# Altium PCB PCB1.PcbDoc
Units mil, origin at the board's own origin, x right, y up, seen from the top; angles counter-clockwise.
Board outline 3740.16 x 3345.16 mil, 2 copper layers (Top Layer, Bottom Layer); 67 components, 35 nets, 276 pads, 45 vias.
Unrouted connection lines stored in the file: 4.
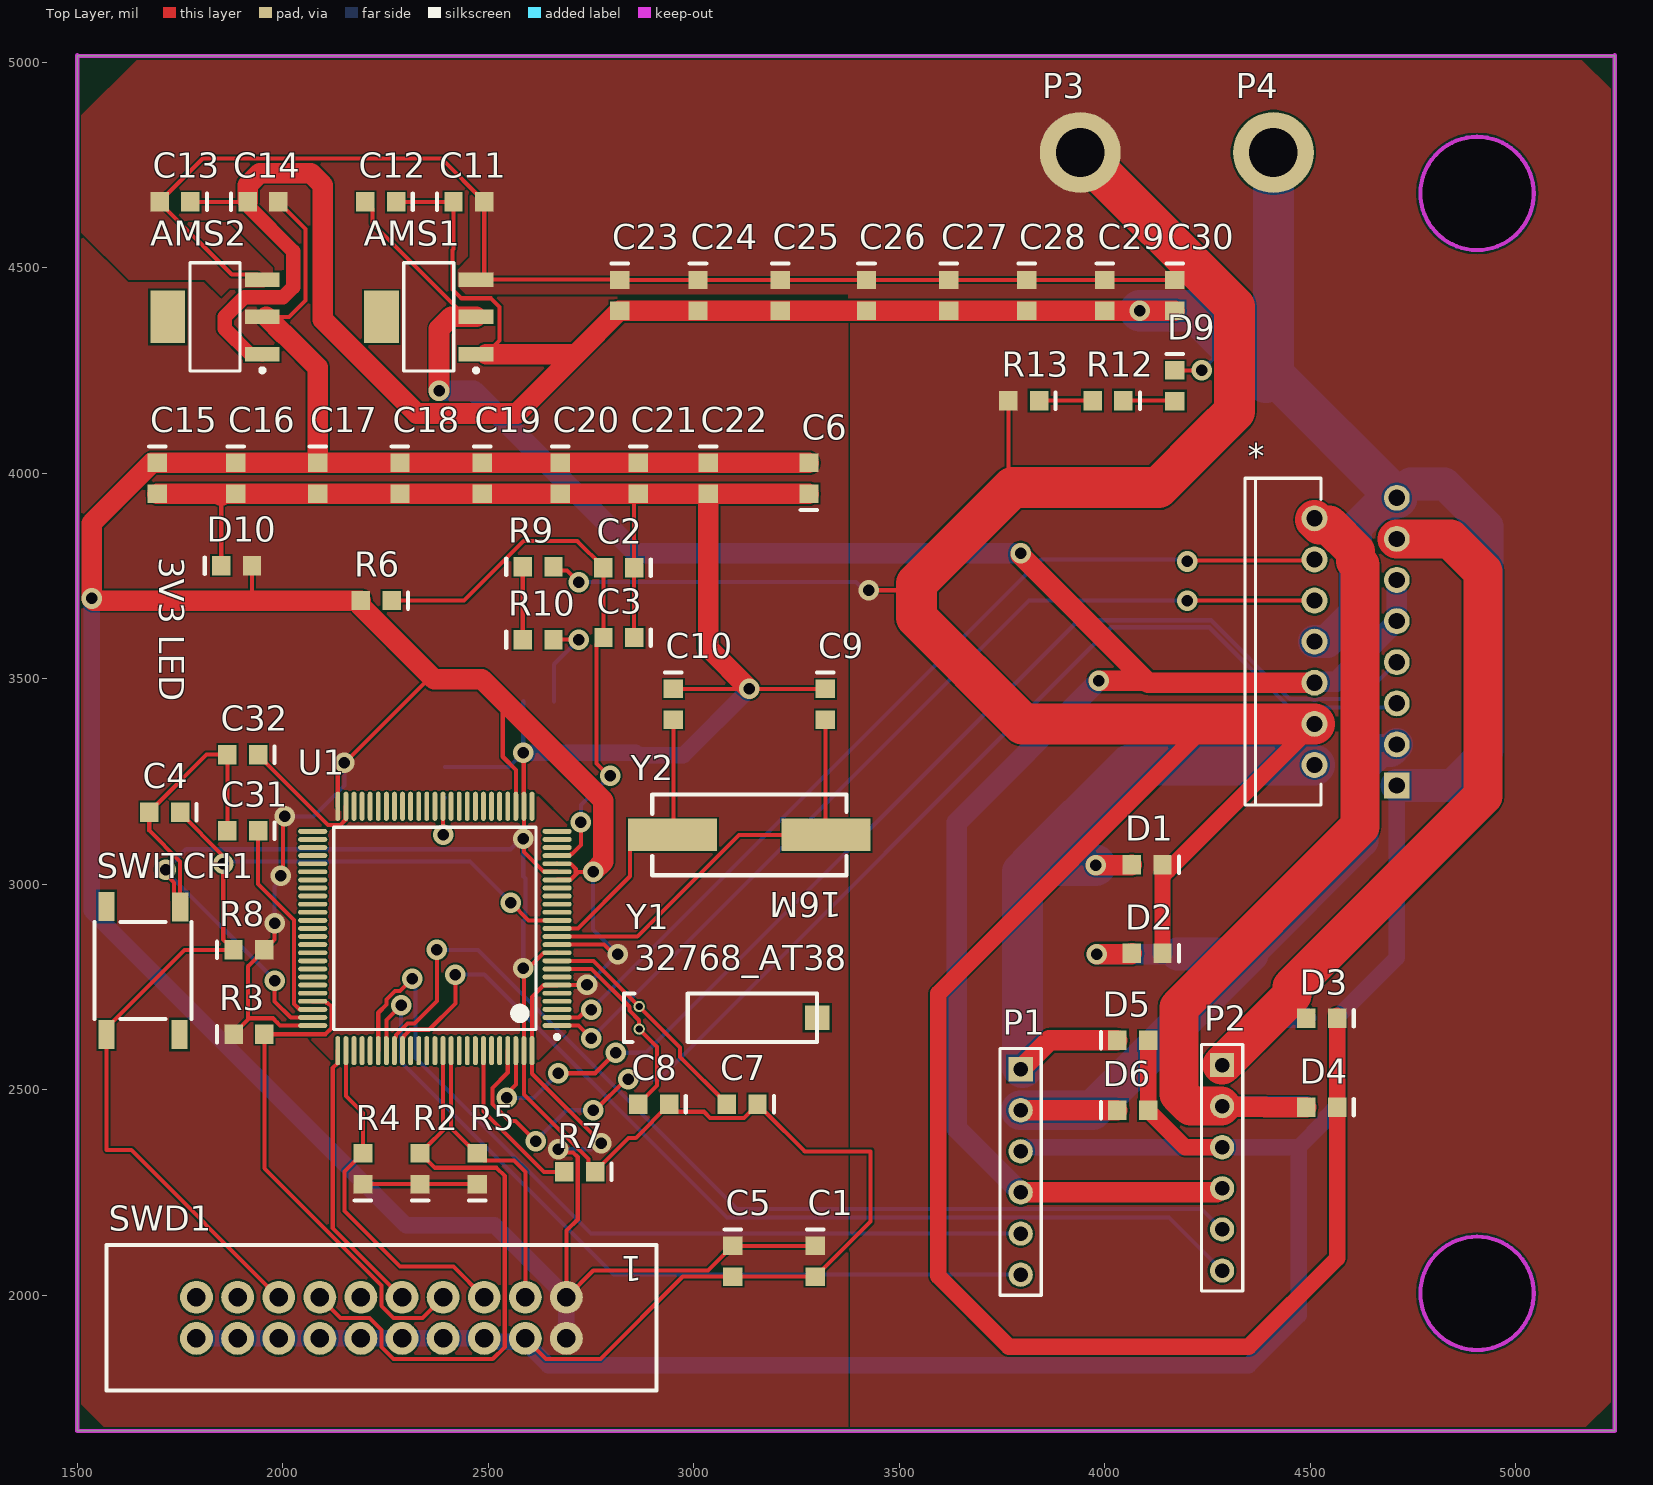
[diagram p0: Top Layer view]
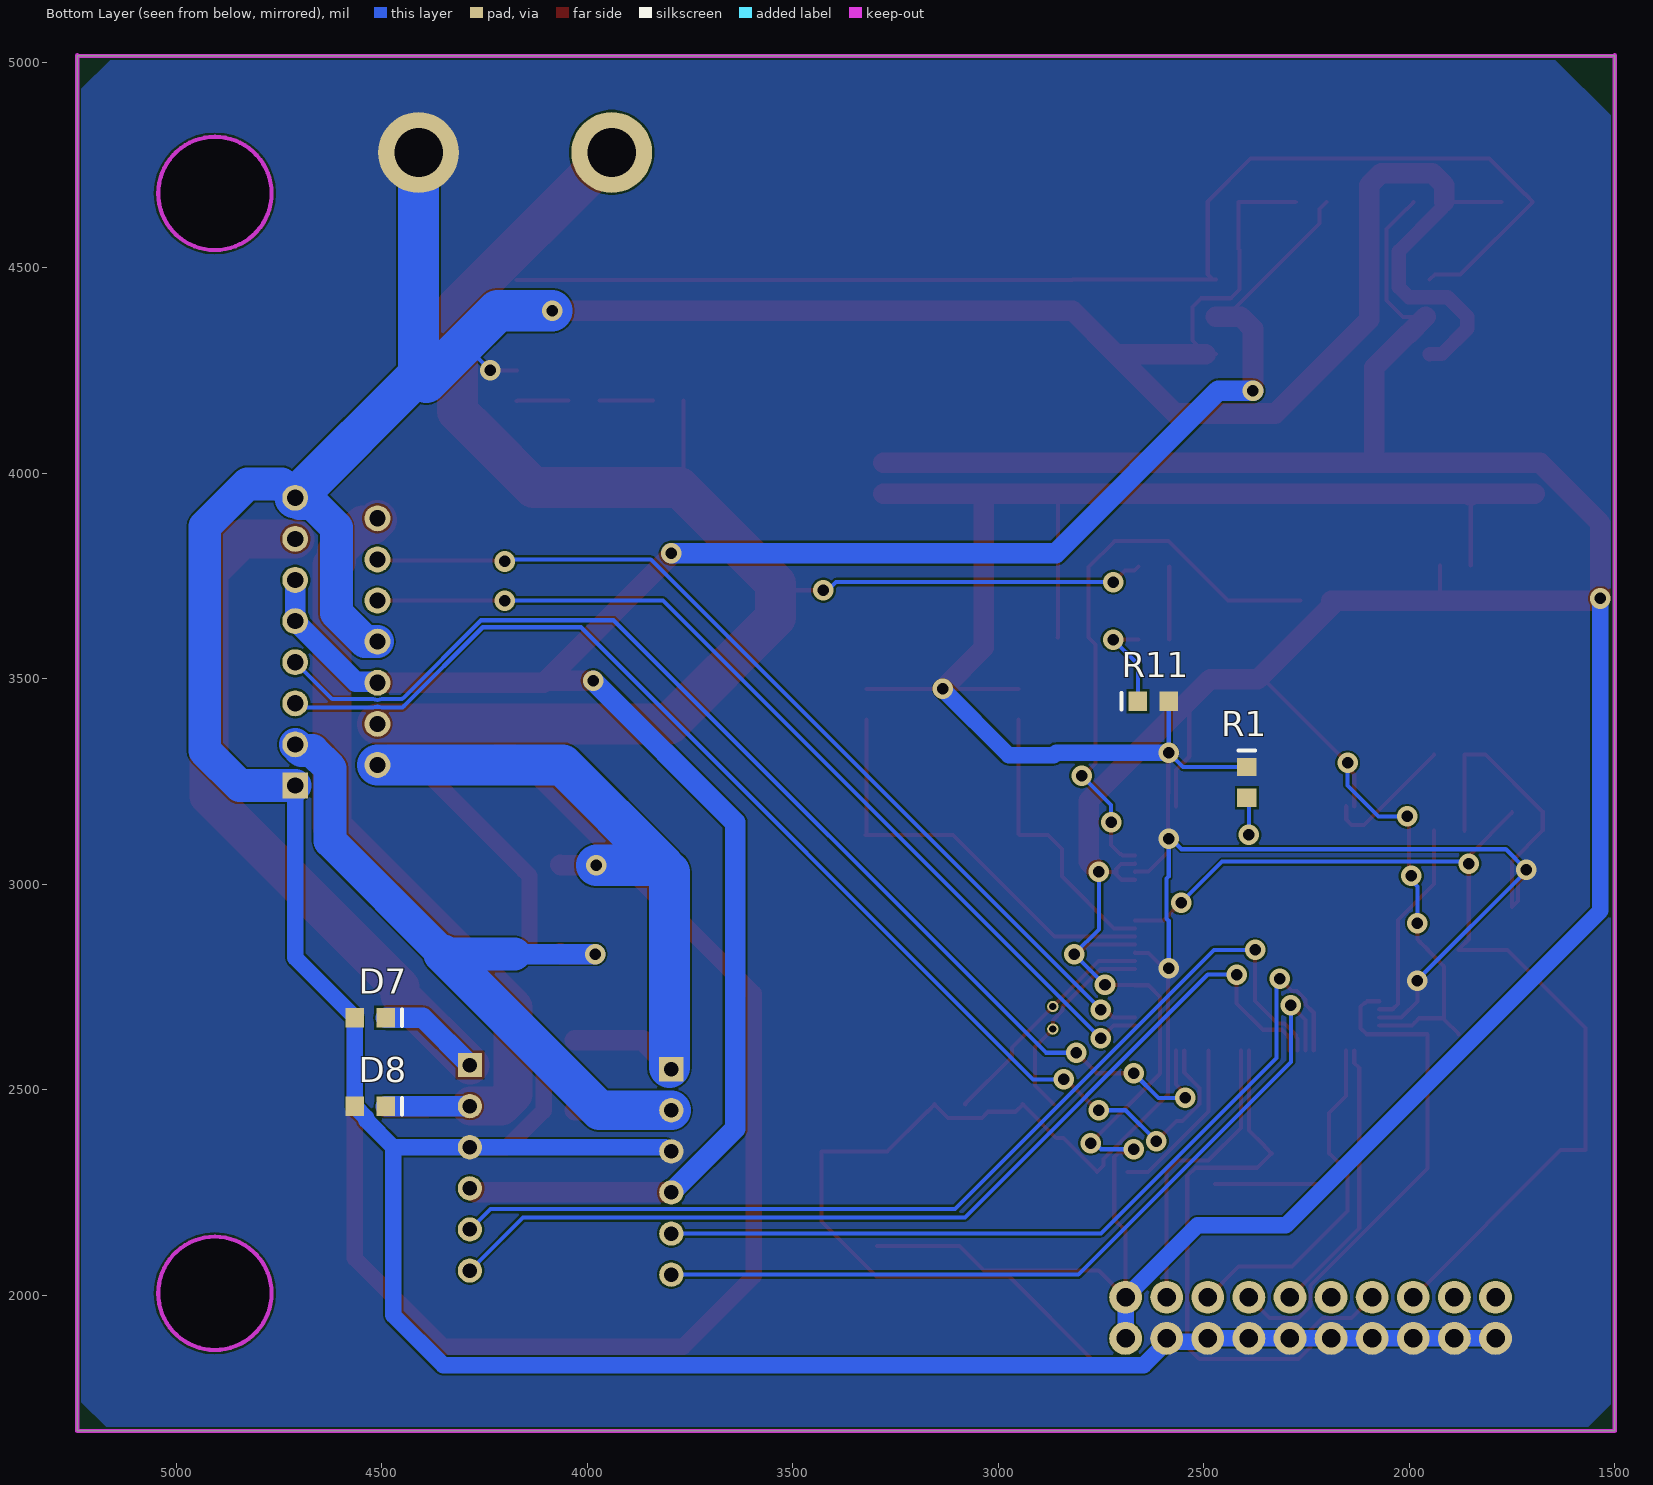
[diagram p1: Bottom Layer view, seen from below]

## Layer stack, top to bottom
Top Solder: solder mask 0.4, Solder Resist, Dk 3.5
Top Layer: signal copper 1.4
Dielectric 1: dielectric 12.6, FR-4, Dk 4.8
Bottom Layer: signal copper 1.4
Bottom Solder: solder mask 0.4, Solder Resist, Dk 3.5

## Board outline
1500,1670 1500,5015.16 5240.16,5015.16 5240.16,1670
cut-out: 4767.56,2004.65 ccw(c4905.35,2004.65) 4905.35,1866.85 ccw(c4905.35,2004.65) 5043.15,2004.65 ccw(c4905.35,2004.65) 4905.35,2142.44 ccw(c4905.35,2004.65)
cut-out: 4767.56,4680.35 ccw(c4905.35,4680.35) 4905.35,4542.56 ccw(c4905.35,4680.35) 5043.15,4680.35 ccw(c4905.35,4680.35) 4905.35,4818.15 ccw(c4905.35,4680.35)

## Design rules (kind name [scope] priority, off if disabled: settings)
Clearance [All] p1: gap=5 ignorepadtopadclearanceinfootprint=FALSE
PlaneConnect [All] p1: planeconnectstyle=Direct reliefexpansion=20 reliefentries=4 reliefconductorwidth=10 reliefairgap=10
PolygonConnect [All] p1: connectstyle=Direct reliefconductorwidth=10 reliefentries=4 polygonreliefangle="90 Angle" airgapwidth=10
RoutingVias [All] p1: holewidth=28 width=50 viastyle="Through Hole" minholewidth=28 minwidth=50 maxholewidth=28 maxwidth=50
SolderMaskExpansion [All] p1: expansion=4 istentingtop=FALSE
Width [All] p1: maxlimit=100 minlimit=10 preferedwidth=10
29 further rules are at their usual default settings.

## Classes and differential pairs
component class STM32F407VET6: C1 C2 C3 C4 C5 C6 C7 C8 C9 C10 C31 C32 R1 R2 R3 R4 R5 R6 R7 R8 SWD1 SWITCH1 U1 Y1 Y2
component class POWER: AMS1 AMS2 C11 C12 C13 C14 C15 C16 C17 C18 C19 C20 C21 C22 C23 C24 C25 C26 C27 C28 C29 C30 D9 D10 P3 P4 R9 R10 R11 R12 R13
component class MOTOR1: * D1 D2 D3 D4 D5 D6 D7 D8 P1 P2
net class M2EC[1..2]: M2EC1 M2EC2
net class M2CTL[1..2]: M2CTL1 M2CTL2
net class M1EC[1..2]: M1EC1 M1EC2
net class M1CTL[1..2]: M1CTL1 M1CTL2

## Components (designator, comment, footprint, x,y, rotation, side; value= is the part's Value field where it differs from the comment)
* "L298N" L298N-DIP -44488.23,-45849.15 r180 top
AMS1 "AMS1117" AMS1117 2355,4380 r180 top
AMS2 "AMS1117" AMS1117 1835,4380 r180 top
C1 "104" MY0805 3295,2045.2 r90 top
C2 "106" MY0805 2780,3770 r0 top
C3 "106" MY0805 2780.2,3600 r0 top
C4 "106" MY0805 1675.2,3175 r0 top
C5 "102" MY0805 3095,2045.2 r90 top
C6 "106" MY0805 3280,4025 r270 top
C7 "20pF" MY0805 3080,2465 r0 top value=20PF
C8 "20pF" MY0805 2865.2,2465 r0 top value=20PF
C9 "20pF" MY0805 3320,3400.2 r90 top value=20PF
C10 "20pF" MY0805 2950,3400.2 r90 top value=20PF
C11 "22uF" MY0805 2490.04,4660 r180 top
C12 "22uF" MY0805 2201.05,4660 r0 top
C13 "22uF" MY0805 1700.2,4660 r0 top
C14 "22uF" MY0805 1989.18,4660 r180 top
C15 "104" MY0805 1695,3950 r90 top
C16 "104" MY0805 1885,3950 r90 top
C17 "104" MY0805 2085,3950 r90 top
C18 "104" MY0805 2285,3950 r90 top
C19 "104" MY0805 2485,3950 r90 top
C20 "104" MY0805 2675,3950 r90 top
C21 "104" MY0805 2865,3950 r90 top
C22 "104" MY0805 3035,3950 r90 top
C23 "106" MY0805 2820,4395 r90 top
C24 "106" MY0805 3010,4395 r90 top
C25 "106" MY0805 3210,4395 r90 top
C26 "106" MY0805 3420,4395 r90 top
C27 "106" MY0805 3620,4395 r90 top
C28 "106" MY0805 3810,4395 r90 top
C29 "106" MY0805 4000,4395 r90 top
C30 "106" MY0805 4170,4395 r90 top
C31 "2.2uF" MY0805 1865,3130 r0 top
C32 "2.2uF" MY0805 1865,3315 r0 top
D1 "Diode" MY0805 4065.2,3047.22 r0 top
D2 "Diode" MY0805 4065.2,2831.67 r0 top
D3 "Diode" MY0805 4490.2,2673.33 r0 top
D4 "Diode" MY0805 4490.2,2457.78 r0 top
D5 "Diode" MY0805 4105,2620 r180 top
D6 "Diode" MY0805 4105,2450 r180 top
D7 "Diode" MY0805 4565,2675 r180 bottom
D8 "Diode" MY0805 4564.8,2460 r180 bottom
D9 "LED2" MY0805 4170,4175.2 r90 top
D10 "LED2" MY0805 1925,3775 r180 top
P1 "Header 6" HDR1X6 3795,2550 r270 top
P2 "Header 6" HDR1X6 4285,2560 r270 top
P3 "Plug_12V" Hole_3MM 3940,4780 r0 top
P4 "Plug_GND" Hole_3MM 4410,4780 r0 top
R1 "1K" MY0805 2395,3210.2 r90 bottom
R2 "1K" MY0805 2333.81,2345 r270 top
R3 "1K" MY0805 1955,2635 r180 top
R4 "1K" MY0805 2195,2345 r270 top
R5 "1K" MY0805 2472.63,2345 r270 top
R6 "0R" MY0805 2190,3690 r0 top
R7 "10K" MY0805 2685,2300 r0 top
R8 "10K" MY0805 1954.8,2840 r180 top
R9 "10K" MY0805 2658.56,3772.5 r180 top
R10 "1K" MY0805 2658.56,3595 r180 top
R11 "1K" MY0805 2585.2,3445 r0 bottom
R12 "220R" MY0805 3970.2,4176.38 r0 top value=1K
R13 "220R" MY0805 3765.2,4176.38 r0 top value=1K
SWD1 "SWD/JTAG" SWD 2240,1945 r180 top
SWITCH1 "开关" 开关 1660,2790 r270 top
U1 "STM32F407VET6" STM-LQFP100_N 2370,2892.24 r180 top
Y1 "晶振32768" 晶振32768K_AT38 2985.04,2675 r270 top
Y2 "晶振16M" 晶振16M 3135,3120 r180 top

## Footprints (in the part's own frame and the unit in brackets; to place one, negate y for a bottom-side part, rotate by r counter-clockwise, add the part's x,y. Pads: shape width x height; smd on the part's side, far side on the other; paste and mask are expansions set on the pad)
AMS1117 [mm] "SOT223, 4-Leads, Body 6.50x7.00mm (avg), Pitch 2.30mm, IPC Medium Density"
  rect 2.15x0.9 smd: 1(-2.925,2.3) 2(-2.925,0) 3(-2.925,-2.3)
  rect 2.15x3.25 smd: 4(2.925,0)
  silkscreen extent -3.05,-3.35 1.55,3.42, body extent -1.85,-3.35 1.85,3.35, height 1.8
HDR1X6 [mm] "Connector; Header; 6 Position"
  rect 1.5x1.5 hole 0.9: 1(0,0)
  round 1.5 hole 0.9: 2(2.54,0) 3(5.08,0) 4(7.62,0) 5(10.16,0) 6(12.7,0)
  silkscreen extent -1.27,-1.27 13.97,1.27
Hole_3MM [mm]
  round 5 hole 3: 1(0,0)
L298N-DIP [mm]
  rect 1.6x1.6 hole 1: 1(-1249.635,-1246.864)
  round 1.6 hole 1: 2(-1244.555,-1248.134) 3(-1249.635,-1249.404) 4(-1244.555,-1250.674) 5(-1249.635,-1251.944) 6(-1244.555,-1253.214) 7(-1249.635,-1254.484) 8(-1244.555,-1255.754) 9(-1249.635,-1257.024) 10(-1244.555,-1258.294) 11(-1249.635,-1259.564) 12(-1244.555,-1260.834) 13(-1249.635,-1262.104) 14(-1244.555,-1263.374) 15(-1249.635,-1264.644)
  silkscreen extent -1244.95,-1265.85 -1240.25,-1245.65
MY0805 [mm]
  rect 1.14x1.2 smd: 1(0,0) 2(1.9,0)
  silkscreen extent 2.92,-0.51 2.92,0.51
STM-LQFP100_N [mm] "Thin QFP, 100-Leads, Body 14x14mm, Pitch 0.5mm, IPC Medium Density"
  oval 1.8x0.3 smd: 1(-7.55,6) 2(-7.55,5.5) 3(-7.55,5) 4(-7.55,4.5) 5(-7.55,4) 6(-7.55,3.5) 7(-7.55,3) 8(-7.55,2.5) 9(-7.55,2) 10(-7.55,1.5) 11(-7.55,1) 12(-7.55,0.5) 13(-7.55,0) 14(-7.55,-0.5) 15(-7.55,-1) 16(-7.55,-1.5) 17(-7.55,-2) 18(-7.55,-2.5) 19(-7.55,-3) 20(-7.55,-3.5) 21(-7.55,-4) 22(-7.55,-4.5) 23(-7.55,-5) 24(-7.55,-5.5) 25(-7.55,-6) 51(7.55,-6) 52(7.55,-5.5) 53(7.55,-5) 54(7.55,-4.5) 55(7.55,-4) 56(7.55,-3.5) 57(7.55,-3) 58(7.55,-2.5) 59(7.55,-2) 60(7.55,-1.5) 61(7.55,-1) 62(7.55,-0.5) 63(7.55,0) 64(7.55,0.5) 65(7.55,1) 66(7.55,1.5) 67(7.55,2) 68(7.55,2.5) 69(7.55,3) 70(7.55,3.5) 71(7.55,4) 72(7.55,4.5) 73(7.55,5) 74(7.55,5.5) 75(7.55,6)
  oval 0.3x1.8 smd: 26(-6,-7.55) 27(-5.5,-7.55) 28(-5,-7.55) 29(-4.5,-7.55) 30(-4,-7.55) 31(-3.5,-7.55) 32(-3,-7.55) 33(-2.5,-7.55) 34(-2,-7.55) 35(-1.5,-7.55) 36(-1,-7.55) 37(-0.5,-7.55) 38(0,-7.55) 39(0.5,-7.55) 40(1,-7.55) 41(1.5,-7.55) 42(2,-7.55) 43(2.5,-7.55) 44(3,-7.55) 45(3.5,-7.55) 46(4,-7.55) 47(4.5,-7.55) 48(5,-7.55) 49(5.5,-7.55) 50(6,-7.55) 76(6,7.55) 77(5.5,7.55) 78(5,7.55) 79(4.5,7.55) 80(4,7.55) 81(3.5,7.55) 82(3,7.55) 83(2.5,7.55) 84(2,7.55) 85(1.5,7.55) 86(1,7.55) 87(0.5,7.55) 88(0,7.55) 89(-0.5,7.55) 90(-1,7.55) 91(-1.5,7.55) 92(-2,7.55) 93(-2.5,7.55) 94(-3,7.55) 95(-3.5,7.55) 96(-4,7.55) 97(-4.5,7.55) 98(-5,7.55) 99(-5.5,7.55) 100(-6,7.55)
  silkscreen extent -7.68,-6.25 6.25,6.82, body extent -7,-7 7,7, height 1.6
SWD [mil]
  round 80 hole 45: 1(-450,-50) 2(-450,50) 3(-350,-50) 4(-350,50) 5(-250,-50) 6(-250,50) 7(-150,-50) 8(-150,50) 9(-50,-50) 10(-50,50) 11(50,-50) 12(50,50) 13(150,-50) 14(150,50) 15(250,-50) 16(250,50) 17(350,-50) 18(350,50) 19(450,-50) 20(450,50)
  silkscreen extent -669,-177 669,177
开关 [mm]
  rect 1.8x1 smd: 1(-3.916,2.293) 2(3.95,2.25) 3(-3.95,-2.25) 4(3.95,-2.25)
  silkscreen extent -3,-3 3,3
晶振16M [mm]
  rect 5.5x2 smd: 1(-4.75,0) 2(4.75,0)
  silkscreen extent -6,-2.5 6,2.5
晶振32768K_AT38 [mm]
  round 0.7 hole 0.45: 1(-0.7,-3) 2(0.7,-3)
  rect 1.524x1.524 smd: 4(0,8)
  silkscreen extent -1.5,-3.94 1.5,8

## Part data
C1 C2 C3 C4 C5 C6 C7 C8 C9 C10 C15 C16 C17 C18 C19 C20 C21 C22 C23 C24 C25 C26 C27 C28 C29 C30 C31 C32: library part Cap, "Capacitor", LatestRevisionDate=17-Jul-2002, LatestRevisionNote="Re-released for DXP Platform.", PackageDescription="Radial Cap, Thru-Hole; 2 Leads; 0.3 in Pin Spacing", PackageReference=RAD-0.3, Published=8-Jun-2000, Publisher="Altium Limited"
C11 C12 C13 C14: library part "Cap Pol2", "Polarized Capacitor (Axial)", LatestRevisionDate=17-Jul-2002, LatestRevisionNote="Re-released for DXP Platform.", PackageDescription="Polarized Capacitor; 2 Leads", PackageReference=POLAR0.8, Published=8-Jun-2000, Publisher="Altium Limited"
D1 D2 D3 D4 D5 D6 D7 D8: "Default Diode", Code_JEDEC=DO-214-AB, LatestRevisionDate=17-Jul-2002, LatestRevisionNote="Re-released for DXP Platform.", PackageDescription="DO-214-AB/SMC; 2 C-Bend Leads; Body 7.9 x 5.9 mm, inc. leads (LxW)", PackageReference=SMC, PackageVersion=Sep-1996, Published=8-Jun-2000, Publisher="Altium Limited"
D9 D10: "Typical RED, GREEN, YELLOW, AMBER GaAs LED", LatestRevisionDate=17-Jul-2002, LatestRevisionNote="Re-released for DXP Platform.", PackageDescription="SM LED; 2 Flat Leads", PackageReference=3.2X1.6X1.1, PackageVersion=Feb-2002, Published=8-Jun-2000, Publisher="Altium Limited"
P1 P2: "Header, 6-Pin", LatestRevisionDate=17-Jul-2002, LatestRevisionNote="Re-released for DXP Platform.", Publisher="Altium Limited"
P3: library part Plug, LatestRevisionDate=17-Jul-2002, LatestRevisionNote="Re-released for DXP Platform.", Publisher="Altium Limited"
P4: library part Plug, "Plug", LatestRevisionDate=17-Jul-2002, LatestRevisionNote="Re-released for DXP Platform.", Publisher="Altium Limited"
R1 R2 R3 R4 R5 R6 R7 R8 R9 R10 R11 R12 R13: library part Res3, "Resistor", LatestRevisionDate=29-May-2009, LatestRevisionNote="IPC-7351 Footprint Added.", PackageDescription="Chip Resistor", PackageReference=J1-0603, Published=8-Jun-2000, Publisher="Altium Limited"
U1: "ARM Cortex-M4 32-bit MCU+FPU, 210 DMIPS, 512 kB Flash, 192 kB Internal RAM, 82 I/Os, 100-pin LQFP, -40 to 85 degC, Tray", I/Os (High Current)=82, Manufacturer=STMicroelectronics, Operating Frequency(F) (Processor speed) (MHz)=168, Supplier Part Number 1=497-12075-ND, Supply Voltage(Vcc) max (V)=3.6, Supply Voltage(Vcc) min (V)=1.8, ComponentLink1Description="Manufacturer URL", ComponentLink1URL=http://www.st.com/web/en/home.html, ComponentLink2Description=Datasheet, ComponentLink2URL=http://www.st.com/st-web-ui/static/active/en/resource/technical/document/datasheet/DM00037051.pdf, ComponentLink3Description="Package Specification", ComponentLink3URL=http://www.st.com/st-web-ui/static/active/en/resource/technical/document/data_brief/DM00071938.pdf, Core="ARM Cortex-M4", D/A Converter=2x12-bit, DatasheetVersion="Rev. 4", FLASH Size (Prog) (kB)=512, Internal RAM Size (kB)=192, Mounting Technology="Surface Mount", PackageDescription="100-Pin Low Profile Quad Flat Package, 14 x 14 mm Body, 0.5 mm Pitch", PackageReference=LQFP100, PackageVersion="Rev. 1, 06/2013", Packing=Tray, PartNumber=STM32F407VET6, Supplier 1=Digi-Key, Supplier 2=Farnell, Supplier 3=Newark, Supplier 4=Mouser, Supplier Part Number 2=2064367, Supplier Part Number 3=73T2332, Supplier Part Number 4=511-STM32F407VET6
Y1 Y2: library part 晶振

## Via types
v1: diameter 50, hole 28, Top Layer to Bottom Layer, 45 vias

## Nets (pads, with @x,y where several pads share a name; then routed paths per layer and width w, separated by ;. In a path a pad name is that pad's centre, name@x,y a point inside that pad or via, vN(x,y) a via of type N, cw(c..) or ccw(c..) an arc to the next point about the centre after c; other vN are vias at no path point)
+5: *.6 *.9 *.11 AMS1.2 C12.1 P1.4 P2.4 | length 5502.3
  Top Layer w10: C12.1 2218.49,4642.56 2218.49,4607.06 AMS1.2@2445.55,4380 ; P1.4 P1.4@3800,2255 ; P2.4@4280,2255 P2.4
  Top Layer w50: v1(2380,4200) 2380,4350.71 2409.29,4380 2445.55,4380 AMS1.2 ; P1.4 4272.55,2250 4282.55,2260 P2.4 ; v1(3795,3805) 3795,3800 4100,3495 ; v1(3985,3495) 4100,3495 ; *.6 4105,3490 4100,3495 ; *.11@4706.48,3740 *.11
  Bottom Layer w50: v1(2380,4200) 2465,4200 2860,3805 v1(3795,3805) ; P1.4 3640,2405 3640,3150 v1(3985,3495) ; *.6 4512.49,3492.49 4562.49,3492.49 *.9 *.11
+12: *.4 AMS1.3 AMS2.3 C11.1 C13.1 C23.2 C24.2 C25.2 C26.2 C27.2 C28.2 C29.2 C30.2 D1.2 D2.2 D3.2 D4.2 P3.1 R9.1 R13.1 | length 11173.7
  Top Layer w10: AMS2.3 1937.44,4483.27 1875.75,4483.27 1700.2,4658.82 1700.2,4661.18 1717.64,4678.62 1718.82,4678.62 1805.2,4765 2386.22,4765 2490.04,4661.18 C11.1 2490.04,4483.27 AMS1.3@2477.32,4470.55 ; AMS1.3 AMS1.3@2477.32,4470.55 ; R9.1 2667.77,3763.28 2691.72,3763.28 v1(2720,3735) ; v1(3425,3715) 3525,3715 3541.42,3731.42 ; R13.1 3765.2,3974.8 3775,3965 ; C30.2@4171.18,4469.8 C30.2 C29.2 C28.2 C27.2 C26.2 C25.2 C24.2 C23.2 2819.25,4470.55 AMS1.3@2477.32,4470.55 ; 4253.88,4092.5 4257.5,4092.5
  Top Layer w40: D2.2 4140,3020 4153.61,3033.61 *.4 ; 4250.75,3390 3595,2734.25 3595,2046.08 3766.08,1875 4350,1875 4565,2090 D4.2 D3.2 D3.2@4565,2679.95
  Top Layer w100: P3.1 4315,4405 4315,4150 4257.5,4092.5 4130,3965 3775,3965 3541.42,3731.42 3541.42,3648.58 3800,3390 4250.75,3390 *.4
  Bottom Layer w10: v1(2720,3735) 3394.18,3735 3414.18,3715 v1(3425,3715)
GND: *.1 *.8 *.15 AMS1.1 AMS2.1 C1.1 C2.2 C3.2 C4.1 C5.1 C6.2 C7.2 C8.2 C9.2 C10.2 C11.2 C12.2 C13.2 C14.2 C15.1 C16.1 C17.1 C18.1 C19.1 C20.1 C21.1 C22.1 C23.1 C24.1 C25.1 C26.1 C27.1 C28.1 C29.1 C30.1 C31.1 C32.1 D5.1 D6.1 D7.1 D8.1 D9.2 D10.2 P1.3 P2.3 P4.1 R1.2 R7.2 R11.1 SWD1.4 SWD1.6 SWD1.8 SWD1.10 SWD1.12 SWD1.14 SWD1.16 SWD1.18 SWD1.20 SWITCH1.1 U1.10 U1.20 U1.27 U1.74 U1.99 | length 22164.2
  Top Layer w10: v1(1715,3035) 1715,3024.18 1735.6,3003.57 1735.6,2958.87 SWITCH1.1 1750.29,3055.09 1675.2,3130.18 C4.1 1675.2,3176.18 1814.02,3315 C32.1 C31.1 ; C13.2 C14.2 ; D10.2 1850.2,3945.2 ; v1(1980,2765) 1980,2715 2019.29,2675.71 U1.74 ; C12.2 C11.2 2415.24,4545.2 2412.83,4542.8 2412.83,4446.62 2434.18,4425.28 2506.13,4425.28 2527.48,4403.93 2527.48,4322.17 2494.76,4289.45 AMS1.1 ; v1(2585,3320) 2586.19,3318.81 2586.19,3219.85 2586.54,3219.51 U1.27 2586.54,3078.41 2634.56,3030.39 2666.9,3030.39 U1.20 ; SWD1.4 2640,1845 2772.74,1845 2972.93,2045.2 C5.1 C1.1 3296.18,2045.2 3430,2179.02 3430,2350 3269.8,2350 3173.43,2446.38 3172.24,2446.38 C7.2@3154.8,2463.82 ; U1.10 2666.9,2832.84 2634.56,2832.84 2586.54,2784.82 U1.99 2586.54,2488.46 2743.76,2331.24 2743.76,2316.04 R7.2 ; R7.2@2759.8,2301.18 2841.12,2382.5 2858.68,2382.5 C8.2@2940,2463.82 ; C23.1@2818.82,4395 C23.1 ; C3.2 2854.8,3600.2 C2.2 2854.8,3939.8 C21.1 ; C8.2 C8.2@2940,2463.82 ; C10.2 v1(3135,3475) C9.2 ; C7.2 C7.2@3154.8,2463.82 ; C6.2@3279.8,3950 C6.2 ; D9.2 v1(4235,4250) ; C8.2@2940,2463.82 2957.44,2446.38 3024.51,2446.38 3039.51,2431.38 3122.36,2431.38 C7.2@3154.8,2463.82
  Top Layer w35: C14.2 1919.32,4655.06 1919.32,4645.68 2025,4540 2025,4452 2000.5,4427.5 1905.8,4427.5 1858.65,4380.35 1858.65,4351.35 1920.33,4289.67 1949.94,4289.67 AMS2.1
  Top Layer w40: D5.1 D6.1 4105,2448.82 4107.44,2446.38 4108.62,2446.38 4195,2360 P2.3
  Top Layer w50: C15.1 1855,3950 ; 1850.2,3945.2 1855,3950 ; C14.2 1914.38,4700.71 1943.67,4730 2068.21,4730 2097.5,4700.71 2097.5,4373.62 2326.12,4145 2568.82,4145 2713.27,4289.45 ; AMS1.1@2494.76,4289.45 2713.27,4289.45 ; C23.1@2818.82,4395 2713.27,4289.45 ; C23.1 C24.1 C25.1 C26.1 C27.1 C28.1 C29.1 v1(4085,4395) C30.1 ; v1(3135,3475) 3035,3575 C22.1 ; C6.2@3279.8,3950 C22.1 ; 1855,3950 C16.1 C17.1 C18.1 C19.1 C20.1 C21.1 C22.1
  Bottom Layer w10: v1(1980,2765) 1980,2767.5 1715,3032.5 v1(1715,3035) 1765,3085 2553.43,3085 2578.43,3110 v1(2585,3110) 2585,3018.51 2590,3013.51 2590,2915.99 2585,2910.99 v1(2585,2795) ; R1.2 2550,3285 v1(2585,3320) 2585,3444.8 R11.1 ; P1.3 P1.3@3800.16,2350 ; v1(4235,4250) 4291.13,4306.13 4306.13,4306.13 ; D8.1 D8.1@4565,2460.2
  Bottom Layer w40: SWD1.20 SWD1.18 SWD1.16 SWD1.14 SWD1.12 SWD1.10 SWD1.8 SWD1.6 2497.65,1887.35 2588.48,1887.35 2645.82,1830 4350,1830 4471.42,1951.42 4471.42,2360 ; v1(2585,3320) 2858.33,3320 2864.43,3313.9 2973.9,3313.9 v1(3135,3475) ; P1.3@3800.16,2350 3810.16,2360 P2.3 4471.42,2360 ; D8.1 4564.8,2458.82 4537.44,2431.46 4537.44,2426.02 4471.42,2360 ; D8.1@4565,2460.2 4564.9,2460.3 4564.9,2674.9 D7.1 4565,2676.18 4710,2821.18 *.1
  Bottom Layer w50: *.15@4710,3936.48 *.15
  Bottom Layer w80: *.8 4540,3590 4610,3660 4610,3867.92 4668.58,3926.5 4700.01,3926.5 *.15@4710,3936.48 ; *.1 4845,3240 4930,3325 4930,3870 4826.42,3973.58 4743.58,3973.58
  Bottom Layer w100: v1(4085,4395) 4217.27,4395 4306.13,4306.13 4391.13,4221.13 ; P4.1@4410,4795.03 4410,4240 *.15
M1CTL1: *.5 U1.97 | length 2985.3
  Top Layer w10: U1.97 2547.17,2541.66 2510,2504.5 2510,2465.5 2551.42,2424.08 2565.92,2424.08 v1(2615,2375) ; v1(2755,2450) 2760,2450 2835,2525 v1(2840,2525)
  Bottom Layer w10: v1(2615,2375) 2690,2450 v1(2755,2450) ; v1(2840,2525) 2915,2525 4015,3625 4253.79,3625 4445.86,3432.93 4448.79,3430 4498.96,3430 cw(c4510,3390) 4521.04,3430 4700,3430 *.5
M1CTL2: *.7 U1.98 | length 2887.5
  Top Layer w10: v1(2545,2480) 2545,2490.82 2566.85,2512.67 U1.98 ; v1(2670,2540) 2760,2540 v1(2810,2590)
  Bottom Layer w10: v1(2545,2480) 2610,2480 v1(2670,2540) ; v1(2810,2590) 2883.79,2590 3935.86,3642.07 4257.93,3642.07 4447.07,3452.93 4450,3450 4498.96,3450 ccw(c4510,3490) 4521.04,3450 4620,3450 *.7
M1EC1: P1.5 U1.81 | length 2061.4
  Top Layer w10: U1.81 2232.2,2687.2 2252.65,2707.65 2252.65,2719.5 2273.16,2740 2285,2740 v1(2315,2770)
  Bottom Layer w10: v1(2315,2770) 2322.65,2762.35 2322.65,2577.35 2750,2150 P1.5
M1EC2: P1.6 U1.82 | length 1984.1
  Top Layer w10: U1.82 2251.89,2669.24 v1(2287.65,2705)
  Bottom Layer w10: v1(2287.65,2705) 2287.65,2567.35 2805,2050 P1.6
M2CTL1: *.10 U1.1 | length 2296.7
  Top Layer w10: U1.1 2718.98,2656.02 v1(2750,2625) ; v1(4200,3690) *.10
  Bottom Layer w10: v1(2750,2625) 3815,3690 v1(4200,3690)
M2CTL2: *.12 U1.2 | length 2308.5
  Top Layer w10: U1.2 2719.88,2675.71 2739.18,2695 v1(2750,2695) ; v1(4200,3785) 4202.5,3787.5 4507.5,3787.5 *.12
  Bottom Layer w10: v1(2750,2695) 3845,3790 4195,3790 v1(4200,3785)
M2EC1: P2.5 U1.83 | length 2489.3
  Top Layer w10: U1.83 2271.57,2625.02 2275.35,2628.8 2275.35,2632.64 2303.52,2660.81 2320.31,2660.81 2375,2715.5 v1(2375,2840)
  Bottom Layer w10: v1(2375,2840) 2475,2840 3105,2210 4235,2210 P2.5
M2EC2: P2.6 U1.84 | length 2428.6
  Top Layer w10: U1.84 2291.26,2625.02 2295.04,2628.8 2295.04,2631.12 2309.73,2645.81 2355.81,2645.81 2420,2710 v1(2420,2780)
  Bottom Layer w10: v1(2420,2780) 2490,2780 3080.47,2189.53 4155.47,2189.53 P2.6
MOTOR_A_OUTPUT1: *.2 D1.1 D5.2 P1.1 | length 1814.9
  Top Layer w10: D1.1@4065.2,3046.04 D1.1
  Top Layer w50: P1.1 3865,2620 D5.2 ; v1(3977.42,3045.96) 4063.94,3045.96 D1.1
  Bottom Layer w50: P1.1 P1.1@3799.53,2554.53 ; 3799.53,3029.53 3815.96,3045.96
  Bottom Layer w100: P1.1@3799.53,2554.53 3799.53,3029.53 ; v1(3977.42,3045.96) 3815.96,3045.96 4060,3290 *.2
MOTOR_A_OUTPUT2: *.3 D2.1 D6.2 P1.2 | length 2078.2
  Top Layer w50: P1.2 D6.2 ; v1(3980,2830) 4063.53,2830 D2.1
  Bottom Layer w50: v1(3980,2830) 4176.48,2830
  Bottom Layer w80: 4176.48,2830 4350,2830 4625,3105 4625,3281.63 4668.37,3325 4695,3325 *.3
  Bottom Layer w95: P1.2 3970,2450 4350,2830
MOTOR_B_OUTPUT1: *.13 D3.1 D7.2 P2.1 | length 1959
  Top Layer w95: P2.1 4455,2730 4455,2750 4920,3215 4920,3760 4840,3840 *.13
  Bottom Layer w50: P2.1 4400,2675 D7.2
MOTOR_B_OUTPUT2: *.14 D4.1 D8.2 P2.2 | length 2170.5
  Top Layer w10: D4.1@4487.97,2460 D4.1
  Top Layer w50: P2.2 4286.73,2458.27 4389.44,2458.27 4389.93,2457.78 D4.1 ; *.14@4510,3886.48 *.14
  Top Layer w95: P2.2@4282.55,2460 4209.29,2460 4180,2489.29 4180,2700 4620,3140 4620,3776.48 4610,3786.48 4610,3808.79 4544.79,3874 4522.49,3874 *.14@4510,3886.48
  Bottom Layer w50: P2.2 D8.2
NetC2_1: C2.1 C3.1 R6.2 U1.22 | length 1399.6
  Top Layer w10: R6.2 2441.05,3690 2586.05,3835 2716.18,3835 2780,3771.18 C2.1 2780,3600.2 2762.76,3582.95 2762.76,3293.64 2792.49,3263.9 v1(2796.66,3263.9) ; U1.22 2697.26,3069.41 2701.04,3073.19 2703.36,3073.19 2725,3094.83 v1(2725,3150.65)
  Bottom Layer w10: v1(2725,3150.65) 2725,3192.24 v1(2796.66,3263.9)
NetC7_1: C7.1 U1.9 Y1.1 | length 572.6
  Top Layer w10: U1.9 2755.98,2813.5 2966.42,2603.06 2966.42,2579.76 3080,2466.18 C7.1 C7.1@3080,2463.82
NetC8_1: C8.1 U1.8 Y1.2 | length 497.1
  Top Layer w10: U1.8 2751.18,2793.82 2843.15,2701.85 2843.15,2692.71 2866.93,2668.93 Y1.2 2910,2604.37 2910,2509.8 C8.1
NetC9_1: C9.1 U1.12 Y2.1 | length 1038.3
  Top Layer w10: U1.12 2862.33,2872.56 3109.77,3120 Y2.1 3320,3122.01 C9.1
NetC10_1: C10.1 U1.13 Y2.2 | length 695
  Top Layer w10: U1.13 2717.68,2892.24 2844.72,3019.29 2844.72,3085.63 2879.09,3120 Y2.2 2950,3122.01 C10.1
NetC31_2: C31.2 U1.73 | length 508.6
  Top Layer w10: C31.2 1939.8,3000.2 2027.32,2912.68 2027.32,2708.49 2040.07,2695.74 2072.41,2695.74 U1.73
NetC32_2: C32.2 U1.49 | length 322.9
  Top Layer w10: C32.2 1939.8,3313.82 2109.57,3144.06 2140.37,3144.06 2153.12,3156.81 2153.12,3189.14 U1.49
NetD9_1: D9.1 R12.2 | length 126.7
  Top Layer w10: R12.2 4168.82,4176.38 D9.1 D9.1@4171.18,4175.2
NetR1_1: R1.1 U1.37 | length 161.9
  Top Layer w10: U1.37 2389.84,3189.33 2389.84,3120.16 v1(2390,3120)
  Bottom Layer w10: v1(2390,3120) 2390,3205.2 R1.1
NetR7_1: R7.1 U1.94 | length 405.8
  Top Layer w10: U1.94 2488.11,2446.89 2635,2300 R7.1
NetR10_1: R10.1 R11.2 | length 236.3
  Top Layer w10: R10.1 v1(2720,3595)
  Bottom Layer w10: R11.2 2660,3535 v1(2720,3595)
NetR12_1: R12.1 R13.2 | length 130.2
  Top Layer w10: R13.2 R12.1
REF_12V/6: R9.2 R10.2 | length 177.5
  Top Layer w10: R10.2 R9.2
RST: C4.2 R8.2 SWD1.15 SWITCH1.4 U1.14 | length 2514.1
  Top Layer w10: C4.2 1750,3173.82 1855,3068.82 1855,2865 1861.38,2858.62 1862.56,2858.62 1880,2841.18 R8.2 1761.18,2840 1571.42,2650.24 SWITCH1.4 1571.42,2353.58 1631.42,2353.58 SWD1.15 ; v1(2555,2955) 2598.07,2911.93 U1.14
  Bottom Layer w10: v1(1855,3050) 1860,3055 2455,3055 v1(2555,2955)
SWCLK: SWD1.9 U1.76 | length 675
  Top Layer w10: U1.76 2133.78,2564.98 2121.38,2552.58 2121.38,2163.62 SWD1.9
SWDIO: R3.1 SWD1.7 U1.72 | length 1234.7
  Top Layer w10: U1.72@2072.41,2714.73 U1.72 2102.77,2715.08 2106.55,2711.3 2108.87,2711.3 2118.19,2701.98 2118.19,2649.44 2103.75,2635 R3.1 1955,2308.79 2240,2023.79 2240,1974.29 2269.29,1945 2340,1945 SWD1.7
SWO: R2.1 SWD1.13 U1.89 | length 1465.9
  Top Layer w10: SWD1.13 2140,1945 2210.71,1945 2240,1915.71 2240,1874.29 2269.29,1845 2510.71,1845 2540,1874.29 2540,2290 2520,2310 2369.99,2310 R2.1@2334.99,2345 ; R2.1 R2.1@2334.99,2345 ; U1.89 2389.68,2400.87 2352.44,2363.62 2352.44,2362.44 R2.1@2334.99,2345
TDI: R4.1 SWD1.5 U1.77 | length 853.5
  Top Layer w10: U1.77 2153.46,2484.48 2195,2442.94 R4.1 2193.82,2345 2150,2301.18 2150,2205 2285,2070 2415,2070 SWD1.5
TRST: R5.1 SWD1.3 U1.90 | length 717.9
  Top Layer w10: U1.90 2409.37,2407.08 2488.89,2327.56 2562.44,2327.56 2590,2300 SWD1.3
VCC: AMS2.2 C1.2 C5.2 C6.1 C14.1 C15.2 C16.2 C17.2 C18.2 C19.2 C20.2 C21.2 C22.2 D10.1 R2.2 R3.2 R4.2 R5.2 R6.1 R8.1 SWD1.1 SWD1.2 U1.6 U1.11 U1.19 U1.21 U1.28 U1.50 U1.75 U1.100 | length 11252.3
  Top Layer w10: R3.2 1880.2,2636.18 1915,2670.98 ; 1925,3690 D10.1 ; AMS2.2 1960.2,4380 2015,4380 2055,4420 2055,4594.18 2007.81,4641.38 2006.62,4641.38 1989.18,4658.82 C14.1 ; v1(1980,2905) 1980,2865.2 1973.43,2858.62 1972.24,2858.62 1954.8,2841.18 R8.1 1915,2800.2 1915,2670.98 ; v1(1995,3020) 2000,3025 2000,3160 v1(2005,3165) ; U1.75 1993.3,2656.02 1987.44,2661.88 1987.44,2662.76 1976.36,2673.85 1917.87,2673.85 1915,2670.98 ; C17.2 C17.2@2085,4025 ; U1.50 2133.78,3267.96 2150,3284.18 v1(2150,3295) 2353.37,3498.37 2367.95,3498.37 ; R6.1@2190,3676.31 R6.1 ; R4.2 R2.2 R5.2 ; 2535,3445 2535,3310 2566.85,3278.15 U1.28 ; U1.11 2781.31,2852.87 2804.18,2830 v1(2815,2830) ; U1.19 2667.59,3010.7 2699.93,3010.7 2712.68,3023.45 ; U1.21 2667.59,3049.38 2700.62,3049.38 2712.68,3037.32 2712.68,3023.45 ; v1(2670.25,2355.25) 2677.9,2347.6 2706.19,2347.6 2717.44,2336.35 2717.44,2184.57 2690,2157.13 SWD1.1 2755.2,2060.2 3034.02,2060.2 3093.82,2120 C5.2 C1.2 ; v1(2740,2755) 2739.72,2754.72 2667.52,2754.72 U1.6 2666.9,2754.1 2634.56,2754.1 2606.22,2725.76 U1.100 2606.22,2538.78 v1(2775,2370) ; v1(2755,3030) 2719.23,3030 2712.68,3023.45
  Top Layer w50: C15.2 1681.31,4024.8 1535,3878.49 v1(1535,3695) 1540,3690 1925,3690 R6.1 ; C15.2@1695,4025 C17.2@2085,4025 ; AMS2.2@1960.2,4380 2003.03,4337.17 2004.91,4337.17 2085,4257.07 C17.2@2085,4025 ; R6.1@2190,3676.31 2367.95,3498.37 2484.42,3498.37 2780,3202.78 2780,3055 v1(2755,3030) ; C6.1 C17.2@2085,4025
  Bottom Layer w10: v1(1980,2905) 1980,2994.18 1995,3009.18 v1(1995,3020) ; v1(2005,3165) 2075,3165 2150,3240 v1(2150,3295) ; v1(2670.25,2355.25) 2749.43,2355.25 2764.18,2370 v1(2775,2370) ; v1(2740,2755) v1(2815,2830) 2755,2890 v1(2755,3030)
  Bottom Layer w40: v1(1535,3695) 1535,2935 2300,2170 2515,2170 SWD1.1 SWD1.2
pads on no net: AMS1.4 AMS2.4 SWD1.11 SWD1.17 SWD1.19 SWITCH1.2 SWITCH1.3 U1.3 U1.4 U1.5 U1.7 U1.15 U1.16 U1.17 U1.18 U1.23 U1.24 U1.25 U1.26 U1.29 U1.30 U1.31 U1.32 U1.33 U1.34 U1.35 U1.36 U1.38 U1.39 U1.40 U1.41 U1.42 U1.43 U1.44 U1.45 U1.46 U1.47 U1.48 U1.51 U1.52 U1.53 U1.54 U1.55 U1.56 U1.57 U1.58 U1.59 U1.60 U1.61 U1.62 U1.63 U1.64 U1.65 U1.66 U1.67 U1.68 U1.69 U1.70 U1.71 U1.78 U1.79 U1.80 U1.85 U1.86 U1.87 U1.88 U1.91 U1.92 U1.93 U1.95 U1.96 Y1.4

## Polygon pours and split planes (outlines as drawn)
+12 on Top Layer "+12_L01_P012" (solid, pour order 12): 3375,5015 3375,1670 5160,1670 5240,1750 5240,4925 5150,5015
GND on Top Layer "GND_L01_P000" (solid, pour order 0): 2606.22,3230.13 2705,3131.36 2705,2655 2605,2555 2134.05,2555 2032.11,2656.94 2032.11,3128.46 2132.37,3228.72 2133.78,3228.72
VCC on Top Layer "VCC_L01_P011" (solid, pour order 11): 3375,5015 3375,1670 1575,1670 1500,1745 1500,4860 1655,5015 2090,5015
+12 on Top Layer "+12_L01_P003" (solid, pour order 3): 1505,4590 1625,4470 1810,4470 1850,4430 1870,4450 1955,4450 1975,4470 1975,4500 1865,4610 1760,4610 1730,4640 1730,4675 1810,4755 2380,4755 2455,4680 2455,4525 2425,4495 2425,4455 2445,4435 4200,4435 4200,5005 1645,5005 1505,4865
VCC on Top Layer "VCC_L01_P010" (solid, pour order 10): 2185,2310 2160,2285 2160,2235 2270,2125 2450,2125 2520,2195 2520,2270 2490,2300 2235,2300 2225,2310
GND on Bottom Layer "GND_L02_P009" (solid, pour order 9): 5150,5015 5240,4925 5240,1750 5160,1670 1575,1670 1500,1745 1500,1910 1500,4065 1500,4180 1500,4860 1655,5015

## Keep-outs
Keep-Out Layer:
  circle w10: c4905.35,4680.35 r137.8
  circle w10: c4905.35,2004.65 r137.8
  lines w10: 1500,5015.16 5240.16,5015.16 ; 1500,5016.46 1500,1670 5240.16,1670 5240.16,5016.46

## Silkscreen, mask and mechanical layers (free items; w line width, h text height)
Top Overlay:
  text "3V3 LED" at 1700,3795 h60 r270

## Text inside footprints (layer, text, board x,y; h text height)
SWD1: Top Overlay "1" at 2875,2095 h60 r180
Y1: Top Overlay "32768_AT38" at 2855.04,2790 h60
Y2: Top Overlay "16M" at 3360,2980 h60 r180